# EAGLE board PCB_Gabri1.1.1 (EAGLE 7.6.0)
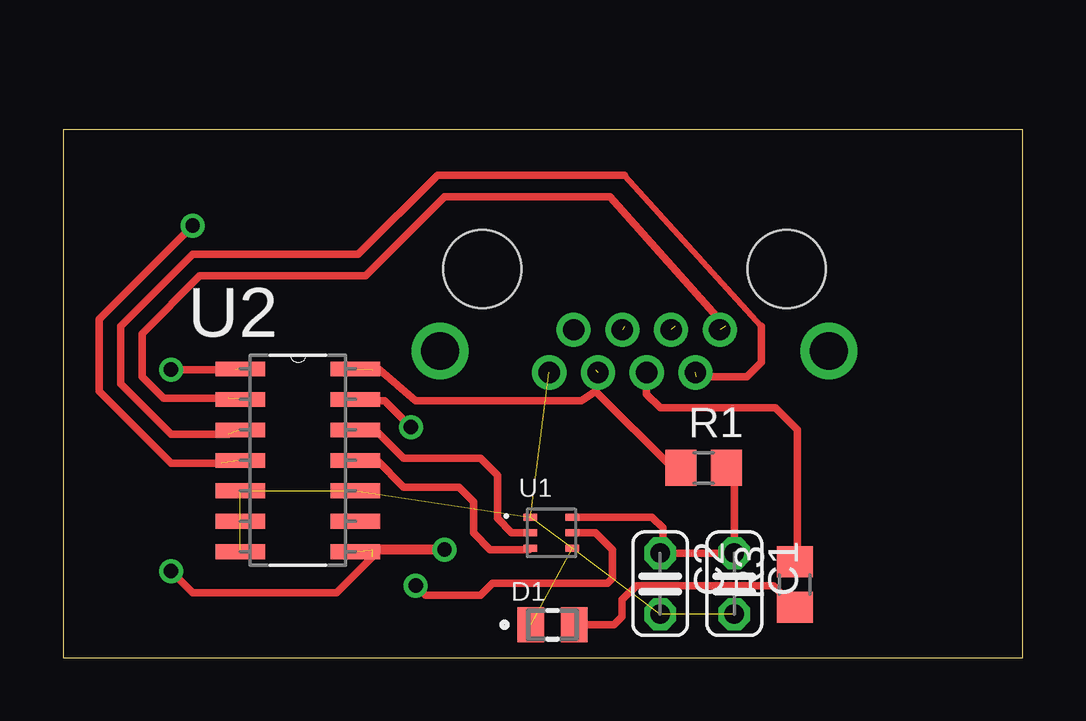
[diagram p0: board, top side]
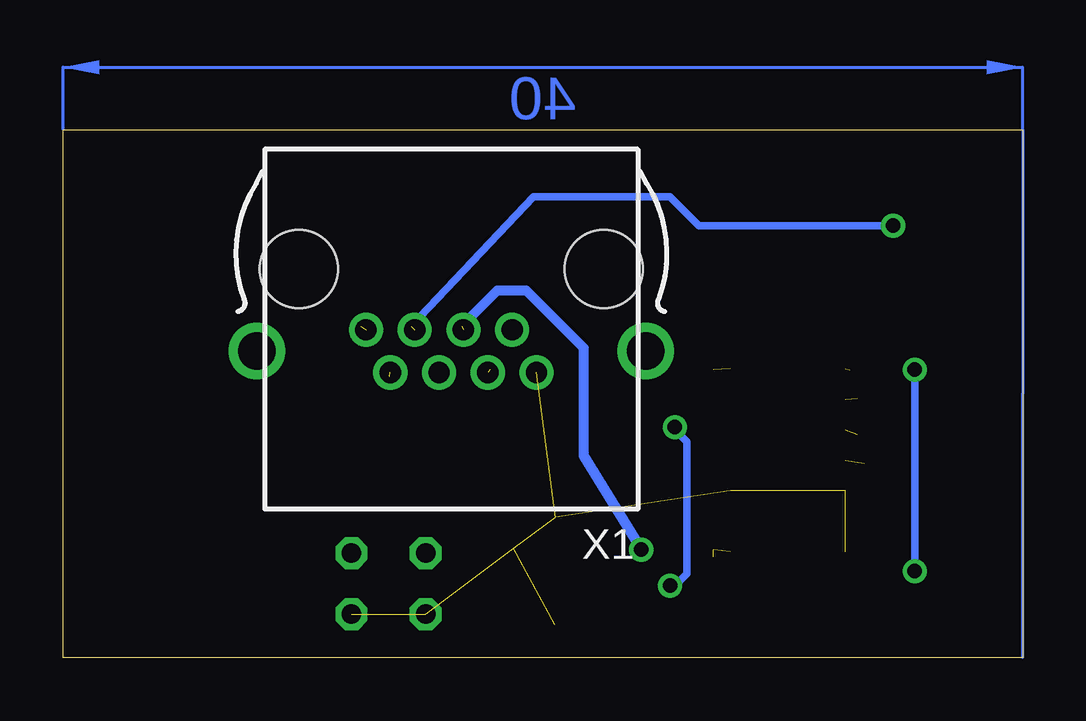
[diagram p1: board, bottom side, seen from below]

Size 40 x 22 mm. Coordinates in mm from the lower left corner, seen from the top.
Outline: 0,0 40,0 40,22 0,22 0,0
Copper layers (1*16): Top 0.035mm / dielectric 1.5mm / Bottom 0.035mm
Design rules "default *": minimum track width 10mil, minimum drill 24mil, track to track 8mil, track to pad 8mil, pad to pad 8mil, via to via 8mil, smd to smd 8mil, copper to edge 20mil, drill to drill 8mil, minimum pad ring 10mil, minimum via ring 8mil, stop-mask expansion 4mil, vias tented up to drill 0mil, thermal gap 10mil

## Footprints (pad centres in the part's own frame; a part is rotated, then mirrored left to right if it is on the bottom)
C025-024X044 = drill 0.813 octagon: 1 -1.27,0; 2 1.27,0
LEDC2012X70N = smd 1.1 x 1.45: A 0.9,0; C -0.9,0
R0805 = smd 1.3 x 1.5: 1 -0.95,0; 2 0.95,0
VISHAY_VEML6030_2X2X0.87 = smd 0.55 x 0.3: 1 -0.875,0.65; 2 -0.875,0; 3 -0.875,-0.65; 4 0.875,-0.65; 5 0.875,0; 6 0.875,0.65
SOIC127P600X175-14N = smd 2.057 x 0.61: 1 -4.801,7.62; 2 -4.801,6.35; 3 -4.801,5.08; 4 -4.801,3.81; 5 -4.801,2.54; 6 -4.801,1.27; 7 -4.801,0; 8 0,0; 9 0,1.27; 10 0,2.54; 11 0,3.81; 12 0,5.08; 13 0,6.35; 14 0,7.62
0446200002 = drill 0.889 pad 1.422: 1 3.556,2.54; 2 2.54,4.318; 3 1.524,2.54; 4 0.508,4.318; 5 -0.508,2.54; 6 -1.524,4.318; 7 -2.54,2.54; 8 -3.556,4.318 | drill 1.575 pad 2.286: S@1 -8.103,3.429; S@2 8.103,3.429 | hole 3.251: 6.35,0; -6.35,0

## Placement (x,y rotation side)
C1  [C025-024X044]  27.98,3.08 270 top
C2  [C025-024X044]  24.89,3.08 270 top
D1  5988170107F  [LEDC2012X70N]  20.4,1.37 0 top
R1  [R0805]  26.7,7.9 0 top
R3  [R0805]  30.5,3.05 90 top
U1  VEML6030  [VISHAY_VEML6030_2X2X0.87]  20.35,5.2 0 top
U2  TXS0104ED  [SOIC127P600X175-14N]  12.19,4.41 0 top
X1  0446200002  [0446200002]  23.82,16.2 180 bottom

## Library data of the parts
C1 C2 R1 R3 = resistor
D1 = 5988170107F; AVAILABILITY: Unavailable; DESCRIPTION: LED GREEN CLEAR 0805 SMD; MF: Dialight; MP: 5988170107F; PACKAGE: 0805 Dialight; PRICE: None
U1 = VEML6030; AVAILABILITY: Unavailable; DESCRIPTION: VEML6030 Series 2 x 2 x 0.85 mm 50 mW I2C High Accuracy Ambient Light Sensor; MF: Vishay; MP: VEML6030; PACKAGE: SMD-6 Vishay; PRICE: None
U2 = TXS0104ED; AVAILABILITY: Unavailable; DESCRIPTION: 4-Bit Bidirectional Voltage-Level Shifter for Open-Drain and Push-Pull Applications 14-SOIC -40 to 85; MF: Texas Instruments; MP: TXS0104ED; PACKAGE: SOIC-14 Texas Instruments; PRICE: None
X1 = 0446200002; AVAILABILITY: Unavailable; DESCRIPTION: Conn RJ-45 RCP 8 POS 2.04mm Solder RA Thru-Hole 8 Terminal 1 Port Tray Cat 3; MF: Molex, LLC; MP: 0446200002; PACKAGE: None; PRICE: None

## Nets
A1: U2.2 X1.1
A2: U2.3 X1.2
A3: U2.4 X1.3
GND: C1.2 C2.2 D1.C U1.1 U1.4 U2.5 U2.7 U2.10 X1.8
INT: U1.3 U2.11
LED_1: R3.2 X1.4
LED_2: D1.A R3.1
LS_VDD: C1.1 C2.1 R1.2 U1.6
SCL: U1.5 U2.13
SDA: U1.2 U2.12
VCCA: U2.1 U2.8 X1.5
VCCB: R1.1 U2.14 X1.6

## Tracks (layer width: path | path; a pad name or v marks a point on that pad's centre or on a via)
A1  (2 unrouted)
  Top 0.305: 6.9,10.8 4.2,10.8 3.3,11.7 3.3,13.5 5.7,15.9 12.6,15.9 15.9,19.2 22.8,19.2 27.6,13.8
A2  (2 unrouted)
  Top 0.254: 23.4,20.1 29.1,13.8
  Top 0.305: 6.9,9.3 4.5,9.3 2.4,11.4 2.4,13.8 5.4,16.8 12.3,16.8 15.6,20.1 23.4,20.1 | 29.1,13.8 29.1,12.3 28.5,11.7 26.4,11.7
A3  (via drill 0.6)  (2 unrouted)
  Top 0.305: 6.6,8.1 4.5,8.1 1.5,11.1 1.5,14.1 v5.4,18
  Bottom 0.305: v5.4,18 13.5,18 14.7,19.2 20.4,19.2 25.5,13.8
GND  (8 unrouted)
INT
  Top 0.305: U2.11 13.08,8.22 14.2,7.1 16.5,7.1 17.1,6.5 17.1,5.2 17.8,4.5 19.42,4.5 U1.3
LED_1
  Top 0.305: X1.4 24.33,10.97 24.9,10.4 29.7,10.4 30.6,9.5 30.6,4.1 R3.2
LED_2
  Top 0.305: D1.A 22.97,1.37 23.3,1.7 23.3,2.4 23.9,3 29.6,3 R3.1
LS_VDD
  Top 0.305: U1.6 24.55,5.85 25,5.4 25,4.46 C2.1 C1.1 27.98,7.53 R1.2
SCL  (via drill 0.6)
  Top 0.305: U1.5 22.2,5.2 22.9,4.5 22.9,3.3 22.7,3.1 17.9,3.1 17.4,2.6 15.1,2.6 v14.7,3 | U2.13 12.2,10.7 13.4,10.7 v14.5,9.6
  Bottom 0.305: v14.7,3 14.5,3 14,3.5 14,9 14.6,9.6 v14.5,9.6
SDA
  Top 0.305: U2.12 13.01,9.49 14.2,8.3 17.4,8.3 18.1,7.6 18.1,5.8 18.7,5.2 U1.2
VCCA  (via drill 0.6)  (4 unrouted)
  Top 0.305: 7.2,12 v4.5,12 | v4.5,3.6 5.4,2.7 11.4,2.7 12.9,4.2
  Top 0.406: v15.9,4.5 12.9,4.5
  Bottom 0.305: v4.5,12 v4.5,3.6
  Bottom 0.406: 23.4,13.8 21.9,15.3 20.7,15.3 18.3,12.9 18.3,8.4 v15.9,4.5
VCCB  (2 unrouted)
  Top 0.305: 22.2,12 22.2,11.1 | 22.2,11.1 21.6,10.7 14.7,10.7 13.2,12 12.9,12 | R1.1 25.4,7.9 22.2,11.1
(copper drawn outside any net)
  shapes: Bottom area x2